# Altium PCB board.PcbDoc
Units mm, origin at the board's own origin, x right, y up, seen from the top; angles counter-clockwise.
Board outline 37 x 24 mm, 2 copper layers (Top Layer, Bottom Layer); 4 components, 7 nets, 42 pads, 3 vias.
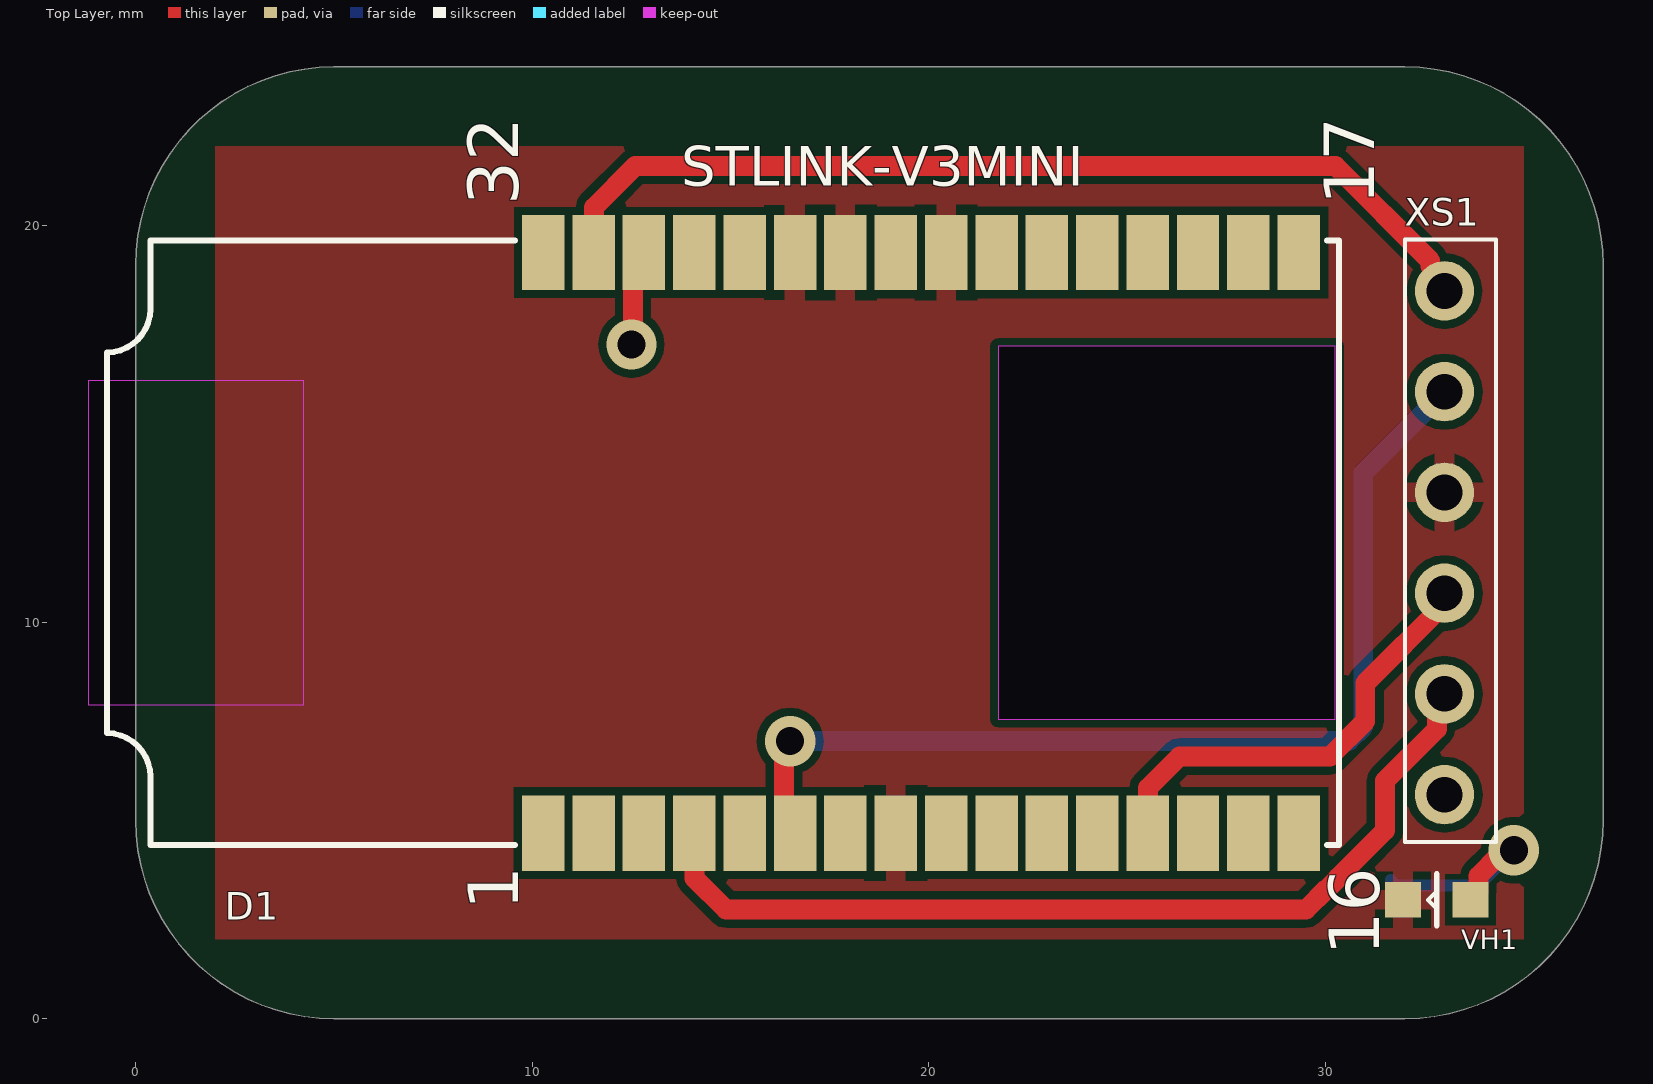
[diagram p0: Top Layer view]
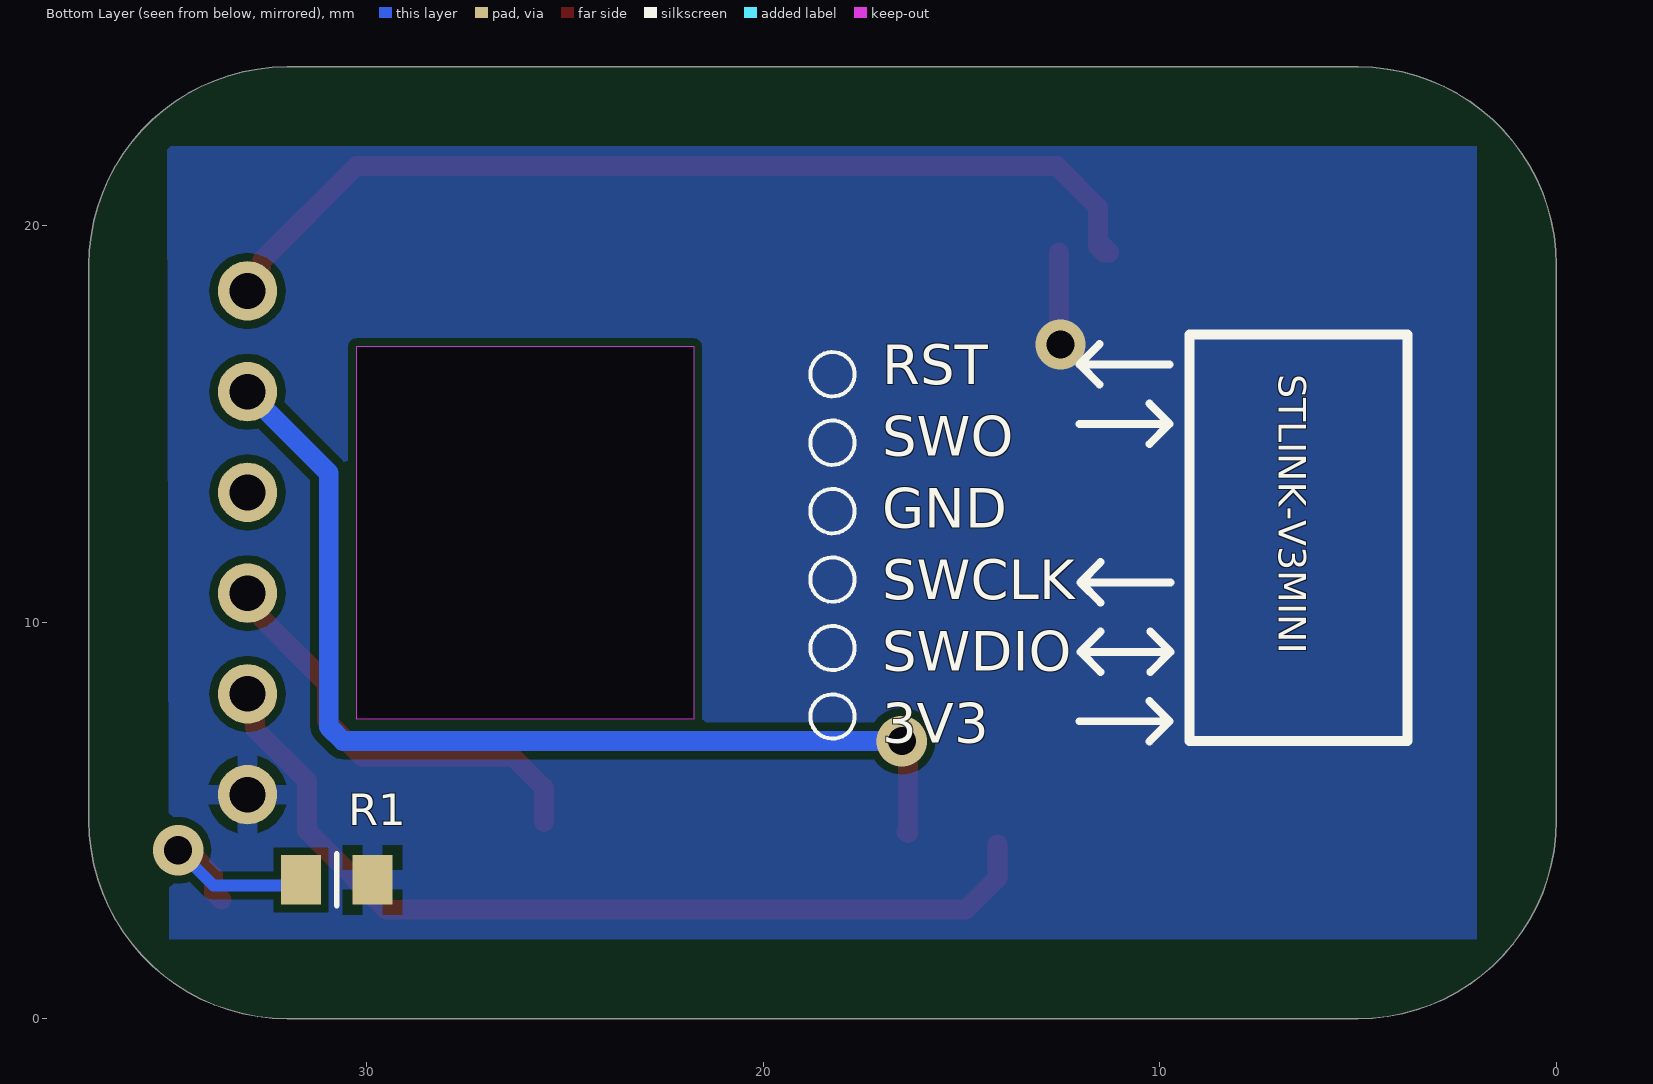
[diagram p1: Bottom Layer view, seen from below]

## Layer stack, top to bottom
Top Solder: solder mask 0.0102, Solder Resist, Dk 3.5
Top Layer: signal copper 0.0356
Dielectric 1: dielectric 0.32, FR-4, Dk 4.8
Bottom Layer: signal copper 0.0356
Bottom Solder: solder mask 0.0102, Solder Resist, Dk 3.5

## Board outline
0,5 0,19 cw(c5,19) 5,24 32,24 cw(c32,19) 37,19 37,5 cw(c32,5) 32,0 5,0 cw(c5,5)
cut-out: 21.75,16.95 21.75,7.55 30.25,7.55 30.25,16.95

## Design rules (kind name [scope] priority, off if disabled: settings)
BoardOutlineClearance [All] p1: gap=0.2 ignorepadtopadclearanceinfootprint=FALSE except(0.4: Arc-SplitBarrior Arc-SplitContinuation Track-SplitBarrior Track-SplitContinuation SMDPad-SplitBarrior SMDPad-SplitContinuation THPad-SplitBarrior THPad-SplitContinuation Via-SplitBarrior Via-SplitContinuation Fill-SplitBarrior Fill-SplitContinuation Poly-SplitBarrior Poly-SplitContinuation Region-SplitBarrior Region-SplitContinuation Text-SplitBarrior Text-SplitContinuation)
Clearance "Clearance Bottom Layer" [OnLayer('Bottom Layer')] p1: gap=0.203 ignorepadtopadclearanceinfootprint=TRUE except(0.254: Arc-Text Track-Text SMDPad-Text THPad-Text Via-Text Fill-Text Poly-Text Region-Text Text-Text)
Clearance "Clearance Top Layer" [OnLayer('Top Layer')] p2: gap=0.203 ignorepadtopadclearanceinfootprint=TRUE except(0.254: Arc-Text Track-Text SMDPad-Text THPad-Text Via-Text Fill-Text Poly-Text Region-Text Text-Text)
Clearance [All] p3: gap=0.2 ignorepadtopadclearanceinfootprint=FALSE except(0.089: Arc-Arc Arc-Track Arc-SMDPad Track-Track Track-SMDPad SMDPad-SMDPad; 0.127: Arc-Via Track-Via SMDPad-Via THPad-Via Via-Via; 0.254: Arc-Text Track-Text SMDPad-Text THPad-Text Via-Text Fill-Text Poly-Text Region-Text Text-Text)
ComponentClearance [All] p1 off: gap=0.254 collisioncheckmode=3 verticalgap=0.254 showdistances=FALSE
HoleSize [All] p1: absolutevalues=TRUE maxlimit=6.3 minlimit=0.2 maxpercent=80.000 minpercent=20.000
MinimumAnnularRing [All] p1: minimumring=0.076
MinimumSolderMaskSliver [All] p1: minsoldermaskwidth=0.1
PolygonConnect PolygonConnect_1 [All] p1: thpad.connectstyle=Relief thpad.reliefconductorwidth=0.508 thpad.reliefentries=4 thpad.polygonreliefangle="90 Angle" thpad.airgapwidth=0.254 smdpad.connectstyle=Relief smdpad.reliefconductorwidth=0.508 smdpad.reliefentries=4 smdpad.polygonreliefangle="90 Angle" smdpad.airgapwidth=0.254 via.connectstyle=Direct via.reliefconductorwidth=0.508 via.reliefentries=4 via.polygonreliefangle="90 Angle" via.airgapwidth=0.254
RoutingCorners [All] p1: cornerstyle=Round minsetback=2.54 maxsetback=2.54
RoutingVias [All] p1: holewidth=0.5 width=1 viastyle="Through Hole" minholewidth=0.2 minwidth=0.45 maxholewidth=1 maxwidth=2
SilkToSilkClearance [All] p1: silktosilkclearance=0.1
SilkToSolderMaskClearance [IsPad] p1: minsilkscreentomaskgap=0.1 clearancetoexposedcopper=TRUE
SolderMaskExpansion [All] p1: expansion=0.102 istentingtop=FALSE
Width [All] p1: maxlimit=2.54 minlimit=0.089 preferedwidth=0.381
24 further rules are at their usual default settings.

## Components (designator, comment, footprint, x,y, rotation, side; value= is the part's Value field where it differs from the comment)
D1 "V3Mini" STV3Mini 19.8,12 r90 top
R1 "600 Ом" 0805 30.75,3.5 r0 bottom
VH1 "0603" led_0603 32.805,3 r0 top
XS1 "DS1071-1*6" PBS-6R 33,5.65 r90 top

## Footprints (in the part's own frame and the unit in brackets; to place one, negate y for a bottom-side part, rotate by r counter-clockwise, add the part's x,y. Pads: shape width x height; smd on the part's side, far side on the other; paste and mask are expansions set on the pad)
0805 [mm] "0805"
  rect 1x1.25 smd: 1(-0.9,0) 2(0.9,0)
  silkscreen extent 0,-0.65 0,0.65, body extent -0.97,-0.6 1.03,0.66, height 0.43
led_0603 [mm] "smd led"
  rect 0.9x0.9 smd: 1(-0.85,0) 2(0.85,0)
  silkscreen extent -0.22,-0.65 0,0.65, body extent -0.8,-0.4 0.8,0.4, height 0.6
PBS-6R [mm] "2.54mm one row socket"
  round 1.5 hole 0.9: 1(0,0) 2(2.54,0) 3(5.08,0) 4(7.62,0) 5(10.16,0) 6(12.7,0)
  silkscreen extent -1.2,-1.3 14,1, body extent -1.22,-10 14.02,0.2, height 2.54
STV3Mini [mm] "ST-LINK-v3-mini"
  rect 1.9x1.07 smd: 1(-7.32,9.525) 2(-7.32,8.255) 3(-7.32,6.985) 4(-7.32,5.715) 5(-7.32,4.445) 6(-7.32,3.175) 7(-7.32,1.905) 8(-7.32,0.635) 9(-7.32,-0.635) 10(-7.32,-1.905) 11(-7.32,-3.175) 12(-7.32,-4.445) 13(-7.32,-5.715) 14(-7.32,-6.985) 15(-7.32,-8.255) 16(-7.32,-9.525) 17(7.32,-9.525) 18(7.32,-8.255) 19(7.32,-6.985) 20(7.32,-5.715) 21(7.32,-4.445) 22(7.32,-3.175) 23(7.32,-1.905) 24(7.32,-0.635) 25(7.32,0.635) 26(7.32,1.905) 27(7.32,3.175) 28(7.32,4.445) 29(7.32,5.715) 30(7.32,6.985) 31(7.32,8.255) 32(7.32,9.525)
  Top Layer keep-out region: -4.1,15.581 -4.1,20.981 4.1,20.981 4.1,15.581 -4.1,15.581
  silkscreen extent -7.62,-10.54 7.62,20.52

## Part data
R1: library part RESISTOR, "Resistor", NameBom="Резистор  600 Ом"
VH1: library part led, Part Number=TO-1608BC-MRE, NameBom=TO-1608BC-MRE, Package=0603
XS1: library part PBS-6(DS1023-1*6), "6 pin 1 row socket"

## Via types
v1: diameter 1.27, hole 0.711, Top Layer to Bottom Layer, tented both sides, 3 vias

## Nets (pads, with @x,y where several pads share a name; then routed paths per layer and width w, separated by ;. In a path a pad name is that pad's centre, name@x,y a point inside that pad or via, vN(x,y) a via of type N, cw(c..) or ccw(c..) an arc to the next point about the centre after c; other vN are vias at no path point)
3V3: D1.30 R1.1 XS1.1 | length 2.3
  Top Layer w0.5: v1(12.5,17) 12.54,17.04 D1.30@12.54,19.32
GND: D1.8 D1.24 D1.26 D1.27 VH1.1 XS1.4
NetR1_2: R1.2 VH1.2 | length 5.4
  Top Layer w0.5: VH1.2 33.855,3.2 33.855,3.601 34.356,4.103 34.603,4.103 v1(34.75,4.25)
  Bottom Layer w0.3: R1.2 31.79,3.36 33.86,3.36 v1(34.75,4.25)
RST: D1.31 XS1.6 | length 24.9
  Top Layer w0.5: D1.31@11.27,19.32 11.552,19.602 11.552,20.458 12.594,21.5 30.25,21.5 32.639,19.111 32.639,18.981 33,18.621 XS1.6 ; D1.31@11.4,19.32 D1.31@11.552,19.472
SWCLK: D1.13 XS1.3 | length 11.1
  Top Layer w0.5: D1.13@25.522,4.962 25.522,5.818 26.319,6.615 30.115,6.615 31,7.5 31,8.459 33,10.459 XS1.3
SWDIO: D1.4 XS1.2 | length 23.5
  Top Layer w0.5: D1.4@14.092,4.398 14.092,3.542 14.884,2.75 29.505,2.75 30.031,3.277 30.048,3.277 30.313,3.542 30.313,3.559 31.5,4.745 31.5,6 32.809,7.309 32.809,7.999 XS1.2
SWO: D1.6 XS1.5 | length 26.3
  Top Layer w0.5: D1.6@16.381,4.711 16.35,4.68 16.35,6.642 16.5,6.792 v1(16.5,7)
  Bottom Layer w0.5: v1(16.5,7) 30.591,7 30.953,7.362 30.953,13.763 XS1.5
pads on no net: D1.1 D1.2 D1.3 D1.5 D1.7 D1.9 D1.10 D1.11 D1.12 D1.14 D1.15 D1.16 D1.17 D1.18 D1.19 D1.20 D1.21 D1.22 D1.23 D1.25 D1.28 D1.29 D1.32

## Polygon pours and split planes (outlines as drawn)
GND on Top Layer "Top Layer-GND" (solid, pour order 14): 2,22 2,2 35,2 35,22
3V3 on Bottom Layer "Bottom Layer-3V3" (solid, pour order 16): 2,22 2,2 34.976,2 35.03,22

## Silkscreen, mask and mechanical layers (free items; w line width, h text height)
Top Overlay:
  text "STLINK-V3MINI" at 13.75,21 h1
Bottom Overlay:
  circle w0.1: c18.25,16.25 r0.559
  circle w0.1: c18.25,14.524 r0.559
  circle w0.1: c18.25,12.798 r0.559
  circle w0.1: c18.25,11.072 r0.559
  circle w0.1: c18.25,9.346 r0.559
  circle w0.1: c18.25,7.62 r0.559
  lines w0.05: 9.75,7.5 9.75,7.5 ; 9.75,7.5 9.75,7.5 ; 9.75,15 9.75,15 ; 9.75,15 9.75,15 ; 12,9.25 12,9.25 ; 12,9.25 12,9.25 ; 12,11 12,11 ; 12,11 12,11 ; 12.025,16.5 12.025,16.5 ; 12.025,16.5 12.025,16.5
  lines w0.2: 9.725,11 12,11 ; 9.75,16.5 12.025,16.5 ; 10.237,8.737 9.725,9.25 ; 10.237,9.763 9.725,9.25 ; 10.263,6.987 9.75,7.5 ; 10.263,8.013 9.75,7.5 ; 10.263,14.487 9.75,15 ; 10.263,15.513 9.75,15 ; 11.487,8.737 12,9.25 ; 11.487,9.763 12,9.25 ; 11.487,10.487 12,11 ; 11.487,11.513 12,11 ; 11.513,15.987 12.025,16.5 ; 11.513,17.013 12.025,16.5 ; 12.025,7.5 9.75,7.5 ; 12.025,15 9.75,15 ; 9.725,9.25 12,9.25
  lines w0.254: 3.75,7 9.25,7 9.25,17.25 3.75,17.25 3.75,7
  text "STLINK-V3MINI" at 7,16.25 h0.7 r90
  text "RST" at 17,16 h1
  text "SWO" at 17,14.192 h1
  text "GND" at 17,12.385 h1
  text "SWCLK" at 17,10.577 h1
  text "SWDIO" at 17,8.769 h1
  text "3V3" at 17,6.962 h1
Mechanical 1:
  lines w0.1: 21.75,7.6 30.248,7.538 30.248,16.938 21.75,17 21.75,7.6 ; 52,-3 52,-3
Mechanical 13:
  lines w0.1: 0,24 0,24 ; 55,24 55,24
Mechanical 15:
  lines w0.1: 0,5 ccw(c5,5) 5,0 32,0 ccw(c32,5) 37,5 37,19 ccw(c32,19) 32,24 5,24 ccw(c5,19) 0,19 0,5 ; 21.75,7.6 30.25,7.6 30.25,17 21.75,17 21.75,7.6

## Dimensions
5,0 to 5,24 on Mechanical 13
0,5 to 37,5 on Mechanical 13
0.369,19.62 to 5,24 on Mechanical 13
0.369,4.38 to 5,0 on Mechanical 13
33,5.65 to 32,0 on Mechanical 13
33,18.35 to 32,24 on Mechanical 13
33,18.35 to 37,19 on Mechanical 13

## Text inside footprints (layer, text, board x,y; h text height)
D1: Top Overlay "32" at 9.64,20.509 h1.27 r90; Top Overlay "1" at 9.64,2.729 h1.27 r90; Top Overlay "16" at 31.357,1.586 h1.27 r90; Top Overlay "17" at 31.23,20.509 h1.27 r90